# Altium PCB IOT_IO_v0.PcbDoc (part 1 of 3)
Units mil, origin at the board's own origin, x right, y up, seen from the top; angles counter-clockwise.
Board outline 8196.85 x 3393.7 mil, 2 copper layers (Top Layer, Top, Bottom Layer, Bottom); 364 components, 308 nets, 1129 pads, 291 vias.
Unrouted connection lines stored in the file: 7.
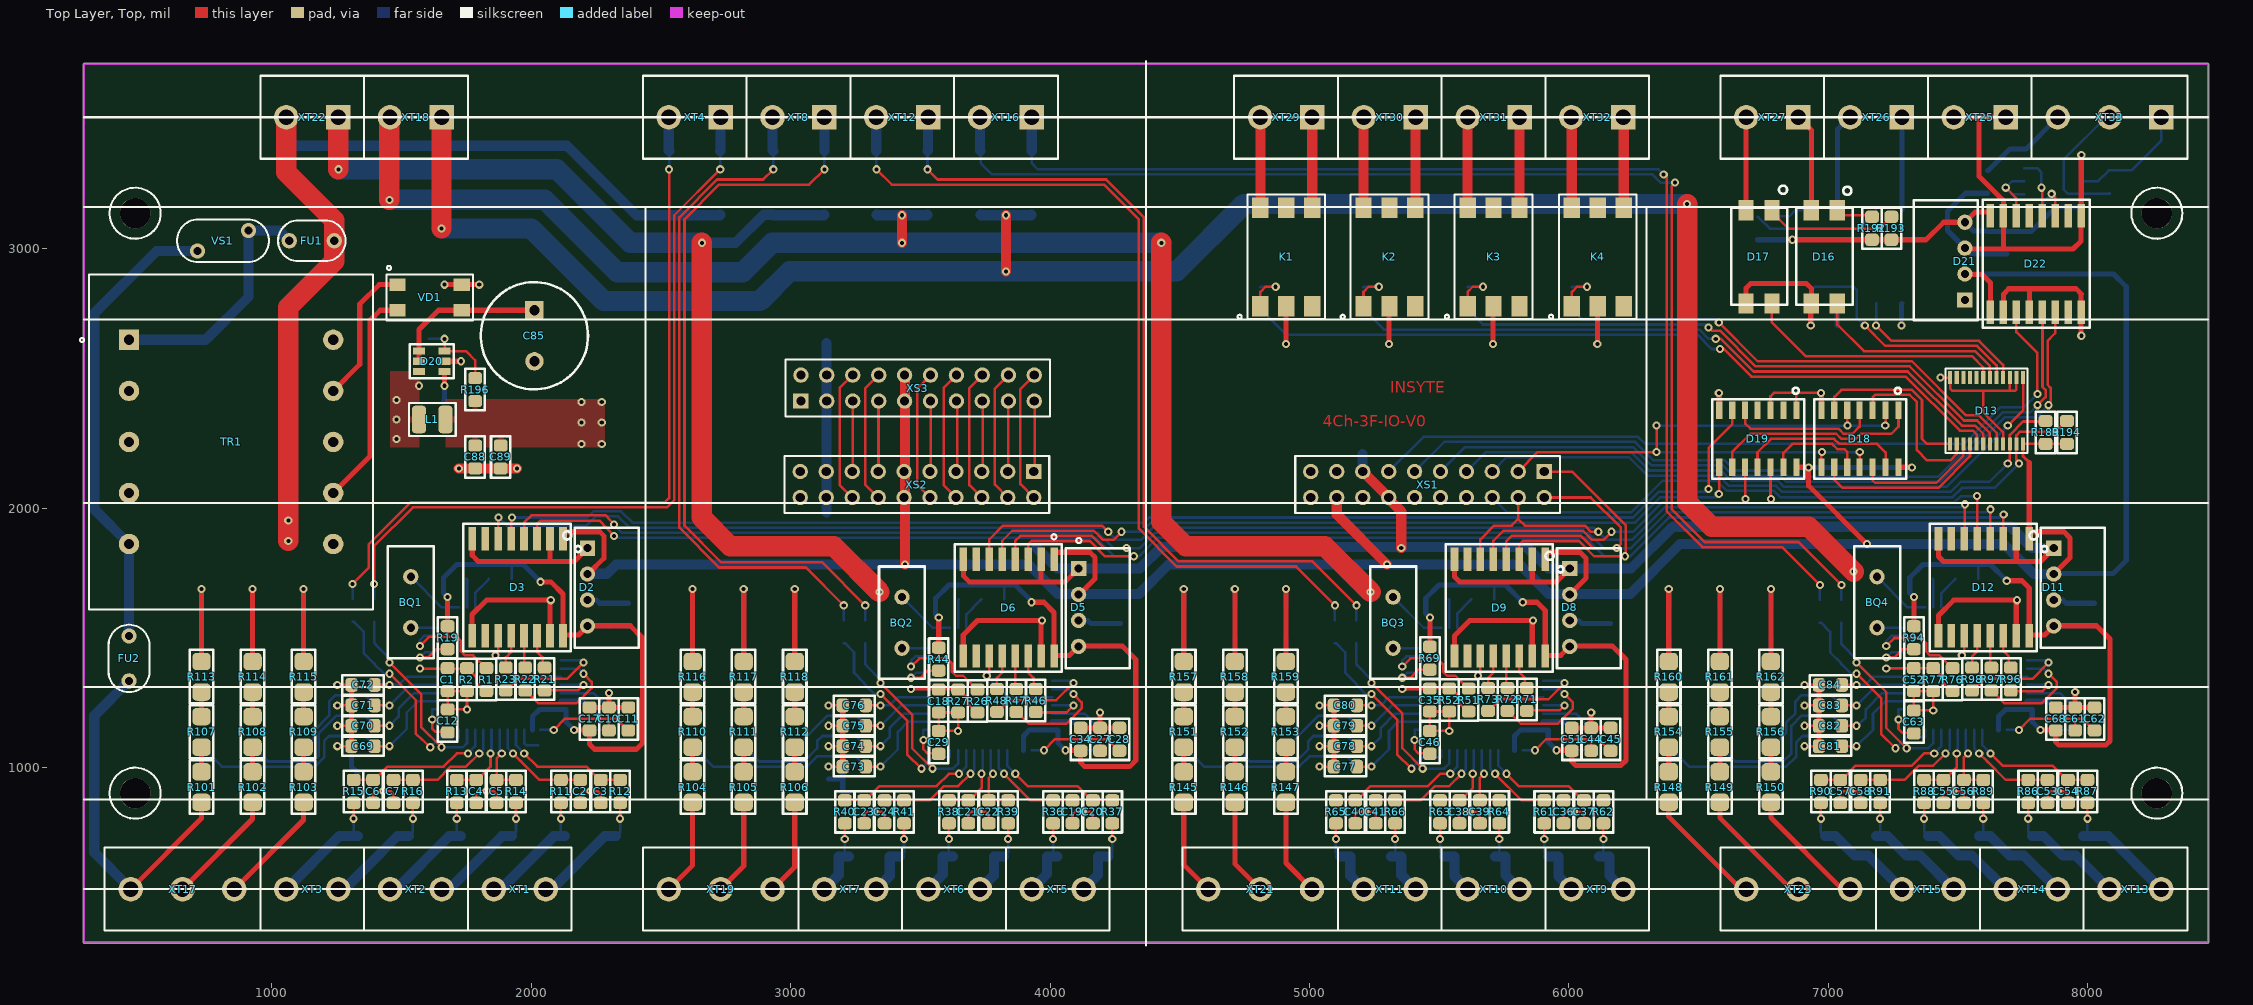
[diagram p0: Top Layer, Top view]
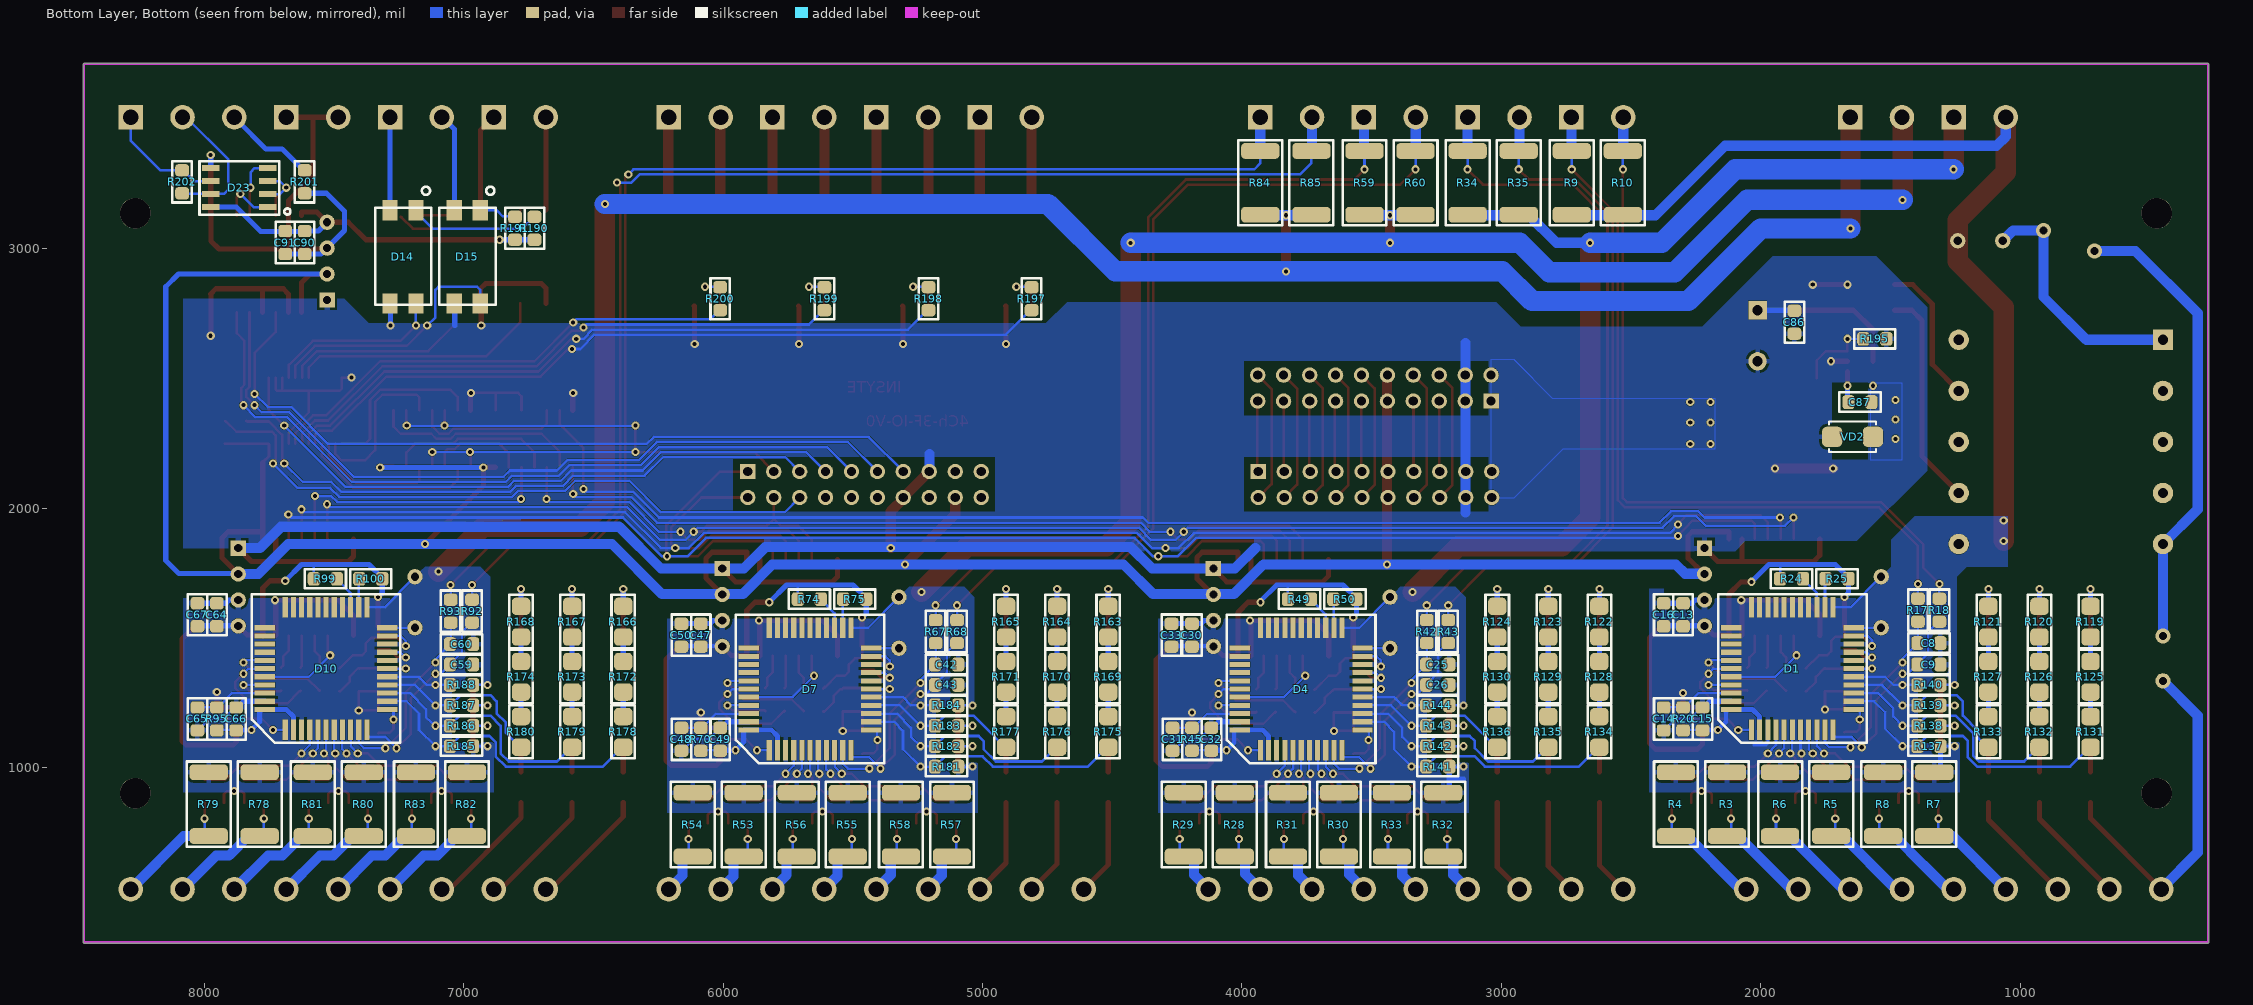
[diagram p1: Bottom Layer, Bottom view, seen from below]

## Layer stack, top to bottom
Top Solder, Top Mask: solder mask 0.4, Solder Resist, Dk 3.5
Top Layer, Top: signal copper 1.4
Dielectric 1: dielectric 12.6, FR-4, Dk 4.8
Bottom Layer, Bottom: signal copper 1.4
Bottom Solder, Bot Mask: solder mask 0.4, Solder Resist, Dk 3.5

## Board outline
271.65,326.77 275.59,322.83 8464.57,322.83 8468.5,326.77 8468.5,3712.6 8464.57,3716.54 275.59,3716.54 271.65,3712.6

## Design rules (kind name [scope] priority, off if disabled: settings)
Clearance "Clearance_Top Layer, Top" [ExistsOnLayer('Top Layer, Top') vs ExistsOnLayer('Top Layer, Top')] p1: gap=0.25 except(7.87: Arc-Arc Arc-Track Arc-THPad Arc-Via Track-Track Track-THPad Track-Via THPad-THPad THPad-Via Via-Via)
Clearance "Clearance_Bottom Layer, Bottom" [ExistsOnLayer('Bottom Layer, Bottom') vs ExistsOnLayer('Bottom Layer, Bottom')] p2: gap=0.25 except(7.87: Arc-Arc Arc-Track Arc-THPad Arc-Via Track-Track Track-THPad Track-Via THPad-THPad THPad-Via Via-Via)
Clearance [All] p3: gap=0.25
ComponentClearance ComponentClearance_Design [All] p1: gap=0.5 collisioncheckmode=3 verticalgap=0.5 showdistances=FALSE
ComponentClearance [All] p2: gap=10 collisioncheckmode=3 verticalgap=10 showdistances=FALSE
PlaneClearance [All] p1: clearance=10
PolygonConnect PolygonConnect_18 [IsPolygon And InNet('GND') And OnLayer('Bottom Layer, Bottom') vs IsVia] p1: connectstyle=Direct reliefconductorwidth=15 reliefentries=4 polygonreliefangle="90 Angle" airgapwidth=10
PolygonConnect PolygonConnect_17 [IsPolygon And InNet('GND') And OnLayer('Bottom Layer, Bottom') vs IsPad] p2: connectstyle=Relief reliefconductorwidth=19.68 reliefentries=4 polygonreliefangle="90 Angle" airgapwidth=10
PolygonConnect PolygonConnect_16 [IsPolygon And InNet('GND3') And OnLayer('Bottom Layer, Bottom') vs IsVia] p3: connectstyle=Direct reliefconductorwidth=15 reliefentries=4 polygonreliefangle="90 Angle" airgapwidth=10
PolygonConnect PolygonConnect_15 [IsPolygon And InNet('GND3') And OnLayer('Bottom Layer, Bottom') vs IsPad] p4: connectstyle=Relief reliefconductorwidth=19.68 reliefentries=4 polygonreliefangle="90 Angle" airgapwidth=10
PolygonConnect PolygonConnect_14 [IsPolygon And InNet('GND4') And OnLayer('Bottom Layer, Bottom') vs IsVia] p5: connectstyle=Direct reliefconductorwidth=15 reliefentries=4 polygonreliefangle="90 Angle" airgapwidth=10
PolygonConnect PolygonConnect_13 [IsPolygon And InNet('GND4') And OnLayer('Bottom Layer, Bottom') vs IsPad] p6: connectstyle=Relief reliefconductorwidth=19.68 reliefentries=4 polygonreliefangle="90 Angle" airgapwidth=10
PolygonConnect PolygonConnect_12 [IsPolygon And InNet('GND2') And OnLayer('Bottom Layer, Bottom') vs IsVia] p7: connectstyle=Direct reliefconductorwidth=15 reliefentries=4 polygonreliefangle="90 Angle" airgapwidth=10
PolygonConnect PolygonConnect_11 [IsPolygon And InNet('GND2') And OnLayer('Bottom Layer, Bottom') vs IsPad] p8: connectstyle=Relief reliefconductorwidth=19.68 reliefentries=4 polygonreliefangle="90 Angle" airgapwidth=10
PolygonConnect PolygonConnect_10 [IsPolygon And InNet('+5V') And OnLayer('Bottom Layer, Bottom') vs IsVia] p9: connectstyle=Direct reliefconductorwidth=15 reliefentries=4 polygonreliefangle="90 Angle" airgapwidth=10
PolygonConnect PolygonConnect_9 [IsPolygon And InNet('+5V') And OnLayer('Bottom Layer, Bottom') vs IsPad] p10: connectstyle=Relief reliefconductorwidth=19.68 reliefentries=4 polygonreliefangle="90 Angle" airgapwidth=10
PolygonConnect PolygonConnect_8 [IsPolygon And InNet('GND1') And OnLayer('Bottom Layer, Bottom') vs IsVia] p11: connectstyle=Direct reliefconductorwidth=15 reliefentries=4 polygonreliefangle="90 Angle" airgapwidth=10
PolygonConnect PolygonConnect_7 [IsPolygon And InNet('GND1') And OnLayer('Bottom Layer, Bottom') vs IsPad] p12: connectstyle=Relief reliefconductorwidth=19.68 reliefentries=4 polygonreliefangle="90 Angle" airgapwidth=10
PolygonConnect PolygonConnect_6 [IsPolygon And InNet('NET00048') And OnLayer('Bottom Layer, Bottom') vs IsVia] p13: connectstyle=Direct reliefconductorwidth=15 reliefentries=4 polygonreliefangle="90 Angle" airgapwidth=10
PolygonConnect PolygonConnect_5 [IsPolygon And InNet('NET00048') And OnLayer('Bottom Layer, Bottom') vs IsPad] p14: connectstyle=Relief reliefconductorwidth=19.68 reliefentries=4 polygonreliefangle="90 Angle" airgapwidth=10
PolygonConnect PolygonConnect_4 [IsPolygon And InNet('+5V') And OnLayer('Top Layer, Top') vs IsVia] p15: connectstyle=Direct reliefconductorwidth=15 reliefentries=4 polygonreliefangle="90 Angle" airgapwidth=10
PolygonConnect PolygonConnect_3 [IsPolygon And InNet('+5V') And OnLayer('Top Layer, Top') vs IsPad] p16: connectstyle=Relief reliefconductorwidth=19.68 reliefentries=4 polygonreliefangle="90 Angle" airgapwidth=10
PolygonConnect PolygonConnect_2 [IsPolygon And InNet('NET00048') And OnLayer('Top Layer, Top') vs IsVia] p17: connectstyle=Direct reliefconductorwidth=15 reliefentries=4 polygonreliefangle="90 Angle" airgapwidth=10
PolygonConnect PolygonConnect_1 [IsPolygon And InNet('NET00048') And OnLayer('Top Layer, Top') vs IsPad] p18: connectstyle=Relief reliefconductorwidth=19.68 reliefentries=4 polygonreliefangle="90 Angle" airgapwidth=10
PolygonConnect [All] p19: connectstyle=Relief reliefconductorwidth=10 reliefentries=4 polygonreliefangle="90 Angle" airgapwidth=10
RoutingVias [All] p1: holewidth=28 width=50 viastyle="Through Hole" minholewidth=28 minwidth=50 maxholewidth=28 maxwidth=50
SolderMaskExpansion [All] p1: expansion=4
Width [All] p1: maxlimit=10 minlimit=10 preferedwidth=10
28 further rules are at their usual default settings.

## Components (designator, comment, footprint, x,y, rotation, side; value= is the part's Value field where it differs from the comment)
BQ1 "13,1072МГц" HC49U_vert 1535.43,1736.22 r270 top
BQ2 "13,1072МГц" HC49U_vert 3429.13,1657.48 r270 top
BQ3 "13,1072МГц" HC49U_vert 5322.83,1657.48 r270 top
BQ4 "13,1072МГц" HC49U_vert 7188.98,1736.22 r270 top
C1 "0,01" 0805 1677.17,1295.28 r90 top
C2 "0,1" 0805 2188.98,952.76 r270 top
C3 "0,1" 0805 2267.72,952.76 r270 top
C4 "0,1" 0805 1787.4,952.76 r270 top
C5 "0,1" 0805 1866.14,952.76 r270 top
C6 "0,1" 0805 1389.76,952.76 r270 top
C7 "0,1" 0805 1468.5,952.76 r270 top
C8 "0,1" 0805 1307.09,1480.32 r0 bottom
C9 "0,1" 0805 1307.09,1397.64 r0 bottom
C10 "0,1" 0805 2299.21,1232.28 r270 top
C11 "10,0" 0805 2374.02,1232.28 r270 top
C12 "1,0" 0805 1677.17,1224.41 r270 top
C13 "0,1" 0805 2299.21,1633.86 r270 bottom
C14 "1,0" 0805 2374.02,1232.28 r270 bottom
C15 "1,0" 0805 2224.41,1232.28 r270 bottom
C16 "10,0" 0805 2374.02,1633.86 r270 bottom
C17 "10,0" 0805 2224.41,1232.28 r270 top
C18 "0,01" 0805 3570.87,1212.6 r90 top
C19 "0,1" 0805 4086.61,874.02 r270 top
C20 "0,1" 0805 4165.35,874.02 r270 top
C21 "0,1" 0805 3685.04,874.02 r270 top
C22 "0,1" 0805 3763.78,874.02 r270 top
C23 "0,1" 0805 3283.46,874.02 r270 top
C24 "0,1" 0805 3362.2,874.02 r270 top
C25 "0,1" 0805 3200.79,1397.64 r0 bottom
C26 "0,1" 0805 3200.79,1318.9 r0 bottom
C27 "0,1" 0805 4192.91,1153.54 r270 top
C28 "10,0" 0805 4267.72,1153.54 r270 top
C29 "1,0" 0805 3570.87,1141.73 r270 top
C30 "0,1" 0805 4192.91,1555.12 r270 bottom
C31 "1,0" 0805 4267.72,1153.54 r270 bottom
C32 "1,0" 0805 4118.11,1153.54 r270 bottom
C33 "10,0" 0805 4271.65,1555.12 r270 bottom
C34 "10,0" 0805 4118.11,1153.54 r270 top
C35 "0,01" 0805 5464.57,1216.54 r90 top
C36 "0,1" 0805 5980.31,874.02 r270 top
C37 "0,1" 0805 6059.06,874.02 r270 top
C38 "0,1" 0805 5578.74,874.02 r270 top
C39 "0,1" 0805 5657.48,874.02 r270 top
C40 "0,1" 0805 5177.17,874.02 r270 top
C41 "0,1" 0805 5255.91,874.02 r270 top
C42 "0,1" 0805 5094.49,1397.64 r0 bottom
C43 "0,1" 0805 5094.49,1318.9 r0 bottom
C44 "0,1" 0805 6086.61,1153.54 r270 top
C45 "10,0" 0805 6161.42,1153.54 r270 top
C46 "1,0" 0805 5464.57,1141.73 r270 top
C47 "0,1" 0805 6086.61,1555.12 r270 bottom
C48 "1,0" 0805 6161.42,1153.54 r270 bottom
C49 "1,0" 0805 6011.81,1153.54 r270 bottom
C50 "10,0" 0805 6161.42,1555.12 r270 bottom
C51 "10,0" 0805 6011.81,1153.54 r270 top
C52 "0,01" 0805 7330.71,1295.28 r90 top
C53 "0,1" 0805 7846.46,952.76 r270 top
C54 "0,1" 0805 7925.2,952.76 r270 top
C55 "0,1" 0805 7444.88,952.76 r270 top
C56 "0,1" 0805 7523.62,952.76 r270 top
C57 "0,1" 0805 7047.24,952.76 r270 top
C58 "0,1" 0805 7125.98,952.76 r270 top
C59 "0,1" 0805 6964.57,1397.64 r0 bottom
C60 "0,1" 0805 6964.57,1476.38 r0 bottom
C61 "0,1" 0805 7952.76,1232.28 r270 top
C62 "10,0" 0805 8027.56,1232.28 r270 top
C63 "1,0" 0805 7330.71,1220.47 r270 top
C64 "0,1" 0805 7952.76,1633.86 r270 bottom
C65 "1,0" 0805 8027.56,1232.28 r270 bottom
C66 "1,0" 0805 7877.95,1232.28 r270 bottom
C67 "10,0" 0805 8027.56,1633.86 r270 bottom
C68 "10,0" 0805 7877.95,1232.28 r270 top
C69 "0,1" 0805 1307.09,1082.68 r0 top
C70 "0,1" 0805 1307.09,1161.42 r0 top
C71 "0,1" 0805 1307.09,1240.16 r0 top
C72 "0,1" 0805 1307.09,1318.9 r0 top
C73 "0,1" 0805 3200.79,1003.94 r0 top
C74 "0,1" 0805 3200.79,1082.68 r0 top
C75 "0,1" 0805 3200.79,1161.42 r0 top
C76 "0,1" 0805 3200.79,1240.16 r0 top
C77 "0,1" 0805 5094.49,1003.94 r0 top
C78 "0,1" 0805 5094.49,1082.68 r0 top
C79 "0,1" 0805 5094.49,1161.42 r0 top
C80 "0,1" 0805 5094.49,1240.16 r0 top
C81 "0,1" 0805 6964.57,1082.68 r0 top
C82 "0,1" 0805 6964.57,1161.42 r0 top
C83 "0,1" 0805 6964.57,1240.16 r0 top
C84 "0,1" 0805 6964.57,1318.9 r0 top
C85 "1000мкФ" К50-35_1000x25-d100x05 2011.81,2763.78 r270 top
C86 "0,1" 0805 1870.08,2673.23 r90 bottom
C87 "0,1" 0805 1661.42,2409.45 r180 bottom
C88 "10,0" 0805 1783.46,2153.54 r90 top
C89 "10,0" 0805 1881.89,2153.54 r90 top
C90 "0,1" 0805 7614.17,2980.32 r90 bottom
C91 "10,0" 0805 7688.98,2980.32 r90 bottom
D1 "{Value}" TQFP-44 2035.43,1145.67 r90 bottom
D2 "AM1L-0303S-NZ" SIP-4 2216.54,1846.46 r270 top
D3 "{Value}" SOL-16 2122.05,1881.89 r270 top
D4 "{Value}" TQFP-44 3929.13,1066.93 r90 bottom
D5 "AM1L-0303S-NZ" SIP-4 4110.24,1767.72 r270 top
D6 "{Value}" SOL-16 4015.75,1803.15 r270 top
D7 "{Value}" TQFP-44 5822.83,1066.93 r90 bottom
D8 "AM1L-0303S-NZ" SIP-4 6003.94,1767.72 r270 top
D9 "{Value}" SOL-16 5909.45,1803.15 r270 top
D10 "{Value}" TQFP-44 7688.98,1145.67 r90 bottom
D11 "AM1L-0303S-NZ" SIP-4 7870.08,1846.46 r270 top
D12 "{Value}" SOL-16 7775.59,1881.89 r270 top
D13 "{Value}" TSSOP-24 7751.97,2503.94 r270 top
D14 "{Value}" DIP-04_Primary 7185.04,3149.61 r270 bottom
D15 "{Value}" DIP-04_Primary 6937.01,3149.61 r270 bottom
D16 "{Value}" DIP-04_Primary 7035.43,3149.61 r270 top
D17 "{Value}" DIP-04_Primary 6783.46,3149.61 r270 top
D18 "{Value}" SO-14 7271.65,2377.95 r270 top
D19 "{Value}" SO-14 6877.95,2377.95 r270 top
D20 "" SOT-23-6 1665.35,2527.56 r180 top
D21 "AM1L-0303S-NZ" SIP-4 7527.56,2803.15 r90 top
D22 "{Value}" SOL-16 7625.98,2755.91 r90 top
D23 "" SO-08 7755.91,3161.42 r0 bottom
FU1 "" LB080F 1240.16,3031.5 r270 top
FU2 "{Value}" LB080F 448.82,1334.65 r180 top
K1 "" DIP-6S 4811.02,2779.53 r90 top
K2 "" DIP-6S 5208.66,2779.53 r90 top
K3 "" DIP-6S 5610.24,2779.53 r90 top
K4 "" DIP-6S 6011.81,2779.53 r90 top
L1 "SRN3015-3R3M" SRN3015 1566.93,2342.52 r0 top
R1 "75к" 0805 1826.77,1295.28 r90 top
R2 "43к" 0805 1751.97,1295.28 r90 top
R3 "0,02" 2512 2129.92,736.22 r90 bottom
R4 "0,02" 2512 2326.77,736.22 r90 bottom
R5 "0,02" 2512 1728.35,736.22 r90 bottom
R6 "0,02" 2512 1925.2,736.22 r90 bottom
R7 "0,02" 2512 1330.71,736.22 r90 bottom
R8 "0,02" 2512 1527.56,736.22 r90 bottom
R9 "0,02" 2512 2728.35,3377.95 r270 bottom
R10 "0,02" 2512 2531.5,3377.95 r270 bottom
R11 "100" 0805 2114.17,952.76 r270 top
R12 "100" 0805 2342.52,952.76 r270 top
R13 "100" 0805 1712.6,952.76 r270 top
R14 "100" 0805 1940.94,952.76 r270 top
R15 "100" 0805 1314.96,952.76 r270 top
R16 "100" 0805 1543.31,952.76 r270 top
R17 "100" 0805 1393.7,1562.99 r90 bottom
R18 "100" 0805 1311.02,1562.99 r90 bottom
R19 "10к" 0805 1677.17,1456.69 r90 top
R20 "10к" 0805 2299.21,1232.28 r270 bottom
R21 "10к" 0805 2051.18,1385.83 r270 top
R22 "10к" 0805 1976.38,1385.83 r270 top
R23 "10к" 0805 1901.57,1385.83 r270 top
R24 "10к" 0805 1925.2,1728.35 r180 bottom
R25 "10к" 0805 1661.42,1728.35 r0 bottom
R26 "75к" 0805 3720.47,1212.6 r90 top
R27 "43к" 0805 3645.67,1212.6 r90 top
R28 "0,02" 2512 4027.56,657.48 r90 bottom
R29 "0,02" 2512 4224.41,657.48 r90 bottom
R30 "0,02" 2512 3625.98,657.48 r90 bottom
R31 "0,02" 2512 3822.83,657.48 r90 bottom
R32 "0,02" 2512 3224.41,657.48 r90 bottom
R33 "0,02" 2512 3421.26,657.48 r90 bottom
R34 "0,02" 2512 3129.92,3377.95 r270 bottom
R35 "0,02" 2512 2933.07,3377.95 r270 bottom
R36 "100" 0805 4011.81,874.02 r270 top
R37 "100" 0805 4240.16,874.02 r270 top
R38 "100" 0805 3610.24,874.02 r270 top
R39 "100" 0805 3838.58,874.02 r270 top
R40 "100" 0805 3208.66,874.02 r270 top
R41 "100" 0805 3437.01,874.02 r270 top
R42 "100" 0805 3287.4,1480.32 r90 bottom
R43 "100" 0805 3204.72,1480.32 r90 bottom
R44 "10к" 0805 3570.87,1374.02 r90 top
R45 "10к" 0805 4192.91,1153.54 r270 bottom
R46 "10к" 0805 3944.88,1303.15 r270 top
R47 "10к" 0805 3870.08,1303.15 r270 top
R48 "10к" 0805 3795.28,1303.15 r270 top
R49 "10к" 0805 3822.83,1649.61 r180 bottom
R50 "10к" 0805 3559.06,1649.61 r0 bottom
R51 "75к" 0805 5614.17,1216.54 r90 top
R52 "43к" 0805 5539.37,1216.54 r90 top
R53 "0,02" 2512 5921.26,657.48 r90 bottom
R54 "0,02" 2512 6118.11,657.48 r90 bottom
R55 "0,02" 2512 5519.69,657.48 r90 bottom
R56 "0,02" 2512 5716.54,657.48 r90 bottom
R57 "0,02" 2512 5118.11,657.48 r90 bottom
R58 "0,02" 2512 5314.96,657.48 r90 bottom
R59 "0,02" 2512 3527.56,3377.95 r270 bottom
R60 "0,02" 2512 3330.71,3377.95 r270 bottom
R61 "100" 0805 5905.51,874.02 r270 top
R62 "100" 0805 6133.86,874.02 r270 top
R63 "100" 0805 5503.94,874.02 r270 top
R64 "100" 0805 5732.28,874.02 r270 top
R65 "100" 0805 5102.36,874.02 r270 top
R66 "100" 0805 5330.71,874.02 r270 top
R67 "100" 0805 5181.1,1480.32 r90 bottom
R68 "100" 0805 5098.43,1480.32 r90 bottom
R69 "10к" 0805 5464.57,1377.95 r90 top
R70 "10к" 0805 6086.61,1153.54 r270 bottom
R71 "10к" 0805 5838.58,1307.09 r270 top
R72 "10к" 0805 5763.78,1307.09 r270 top
R73 "10к" 0805 5688.98,1307.09 r270 top
R74 "10к" 0805 5712.6,1649.61 r180 bottom
R75 "10к" 0805 5448.82,1649.61 r0 bottom
R76 "75к" 0805 7480.31,1295.28 r90 top
R77 "43к" 0805 7405.51,1295.28 r90 top
R78 "0,02" 2512 7787.4,736.22 r90 bottom
R79 "0,02" 2512 7984.25,736.22 r90 bottom
R80 "0,02" 2512 7385.83,736.22 r90 bottom
R81 "0,02" 2512 7582.68,736.22 r90 bottom
R82 "0,02" 2512 6988.19,736.22 r90 bottom
R83 "0,02" 2512 7185.04,736.22 r90 bottom
R84 "0,02" 2512 3929.13,3377.95 r270 bottom
R85 "0,02" 2512 3732.28,3377.95 r270 bottom
R86 "100" 0805 7771.65,952.76 r270 top
R87 "100" 0805 8000,952.76 r270 top
R88 "100" 0805 7370.08,952.76 r270 top
R89 "100" 0805 7598.43,952.76 r270 top
R90 "100" 0805 6972.44,952.76 r270 top
R91 "100" 0805 7200.79,952.76 r270 top
R92 "100" 0805 6968.5,1559.06 r90 bottom
R93 "100" 0805 7051.18,1559.06 r90 bottom
R94 "10к" 0805 7330.71,1456.69 r90 top
R95 "10к" 0805 7952.76,1232.28 r270 bottom
R96 "10к" 0805 7704.72,1385.83 r270 top
R97 "10к" 0805 7629.92,1385.83 r270 top
R98 "10к" 0805 7555.12,1385.83 r270 top
R99 "10к" 0805 7578.74,1728.35 r180 bottom
R100 "10к" 0805 7314.96,1728.35 r0 bottom
R101 "200к" 1206 728.35,866.14 r90 top
R102 "200к" 1206 925.2,866.14 r90 top
R103 "200к" 1206 1122.05,866.14 r90 top
R104 "200к" 1206 2622.05,866.14 r90 top
R105 "200к" 1206 2818.9,866.14 r90 top
R106 "200к" 1206 3015.75,866.14 r90 top
R107 "200к" 1206 728.35,1078.74 r90 top
R108 "200к" 1206 925.2,1078.74 r90 top
R109 "200к" 1206 1122.05,1078.74 r90 top
R110 "200к" 1206 2622.05,1078.74 r90 top
R111 "200к" 1206 2818.9,1078.74 r90 top
R112 "200к" 1206 3015.75,1078.74 r90 top
R113 "200к" 1206 728.35,1291.34 r90 top
R114 "200к" 1206 925.2,1291.34 r90 top
R115 "200к" 1206 1122.05,1291.34 r90 top
R116 "200к" 1206 2622.05,1291.34 r90 top
R117 "200к" 1206 2818.9,1291.34 r90 top
R118 "200к" 1206 3015.75,1291.34 r90 top
R119 "200к" 1206 728.35,1503.94 r90 bottom
R120 "200к" 1206 925.2,1503.94 r90 bottom
R121 "200к" 1206 1122.05,1503.94 r90 bottom
R122 "200к" 1206 2622.05,1503.94 r90 bottom
R123 "200к" 1206 2818.9,1503.94 r90 bottom
R124 "200к" 1206 3015.75,1503.94 r90 bottom
R125 "200к" 1206 728.35,1291.34 r90 bottom
R126 "200к" 1206 925.2,1291.34 r90 bottom
R127 "200к" 1206 1122.05,1291.34 r90 bottom
R128 "200к" 1206 2622.05,1291.34 r90 bottom
R129 "200к" 1206 2818.9,1291.34 r90 bottom
R130 "200к" 1206 3015.75,1291.34 r90 bottom
R131 "200к" 1206 728.35,1078.74 r90 bottom
R132 "200к" 1206 925.2,1078.74 r90 bottom
R133 "200к" 1206 1122.05,1078.74 r90 bottom
R134 "200к" 1206 2622.05,1078.74 r90 bottom
R135 "200к" 1206 2818.9,1078.74 r90 bottom
R136 "200к" 1206 3015.75,1078.74 r90 bottom
R137 "100" 0805 1307.09,1082.68 r0 bottom
R138 "100" 0805 1307.09,1161.42 r0 bottom
R139 "100" 0805 1307.09,1240.16 r0 bottom
R140 "100" 0805 1307.09,1318.9 r0 bottom
R141 "100" 0805 3200.79,1003.94 r0 bottom
R142 "100" 0805 3200.79,1082.68 r0 bottom
R143 "100" 0805 3200.79,1161.42 r0 bottom
R144 "100" 0805 3200.79,1240.16 r0 bottom
R145 "200к" 1206 4515.75,866.14 r90 top
R146 "200к" 1206 4712.6,866.14 r90 top
R147 "200к" 1206 4909.45,866.14 r90 top
R148 "200к" 1206 6385.83,866.14 r90 top
R149 "200к" 1206 6582.68,866.14 r90 top
R150 "200к" 1206 6779.53,866.14 r90 top
R151 "200к" 1206 4515.75,1078.74 r90 top
R152 "200к" 1206 4712.6,1078.74 r90 top
R153 "200к" 1206 4909.45,1078.74 r90 top
R154 "200к" 1206 6385.83,1078.74 r90 top
R155 "200к" 1206 6582.68,1078.74 r90 top
R156 "200к" 1206 6779.53,1078.74 r90 top
R157 "200к" 1206 4515.75,1291.34 r90 top
R158 "200к" 1206 4712.6,1291.34 r90 top
R159 "200к" 1206 4909.45,1291.34 r90 top
R160 "200к" 1206 6385.83,1291.34 r90 top
R161 "200к" 1206 6582.68,1291.34 r90 top
R162 "200к" 1206 6779.53,1291.34 r90 top
R163 "200к" 1206 4515.75,1503.94 r90 bottom
R164 "200к" 1206 4712.6,1503.94 r90 bottom
R165 "200к" 1206 4909.45,1503.94 r90 bottom
R166 "200к" 1206 6385.83,1503.94 r90 bottom
R167 "200к" 1206 6582.68,1503.94 r90 bottom
R168 "200к" 1206 6779.53,1503.94 r90 bottom
R169 "200к" 1206 4515.75,1291.34 r90 bottom
R170 "200к" 1206 4712.6,1291.34 r90 bottom
R171 "200к" 1206 4909.45,1291.34 r90 bottom
R172 "200к" 1206 6385.83,1291.34 r90 bottom
R173 "200к" 1206 6582.68,1291.34 r90 bottom
R174 "200к" 1206 6779.53,1291.34 r90 bottom
R175 "200к" 1206 4515.75,1078.74 r90 bottom
R176 "200к" 1206 4712.6,1078.74 r90 bottom
R177 "200к" 1206 4909.45,1078.74 r90 bottom
R178 "200к" 1206 6385.83,1078.74 r90 bottom
R179 "200к" 1206 6582.68,1078.74 r90 bottom
R180 "200к" 1206 6779.53,1078.74 r90 bottom
R181 "100" 0805 5094.49,1003.94 r0 bottom
R182 "100" 0805 5094.49,1082.68 r0 bottom
R183 "100" 0805 5094.49,1161.42 r0 bottom
R184 "100" 0805 5094.49,1240.16 r0 bottom
R185 "100" 0805 6964.57,1082.68 r0 bottom
R186 "100" 0805 6964.57,1161.42 r0 bottom
R187 "100" 0805 6964.57,1240.16 r0 bottom
R188 "100" 0805 6964.57,1318.9 r0 bottom
R189 "3,3к" 0805 7838.58,2248.03 r90 top
R190 "620" 0805 6728.35,3035.43 r90 bottom
R191 "620" 0805 6803.15,3035.43 r90 bottom
R192 "620" 0805 7169.29,3035.43 r90 top
R193 "620" 0805 7244.09,3035.43 r90 top
R194 "3,3к" 0805 7921.26,2248.03 r90 top
R195 "82к" 0805 1515.75,2653.54 r0 bottom
R196 "430к" 0805 1783.46,2413.39 r90 top
R197 "620" 0805 4811.02,2763.78 r90 bottom
R198 "620" 0805 5208.66,2763.78 r90 bottom
R199 "620" 0805 5610.24,2763.78 r90 bottom
R200 "620" 0805 6011.81,2763.78 r90 bottom
R201 "100" 0805 7614.17,3303.15 r270 bottom
R202 "120" 0805 8086.61,3303.15 r270 bottom
TR1 "" EI305-2052 448.82,2649.61 r0 top
VD1 "" MB10_MB05S(Primary) 1484.25,2862.2 r0 top
VD2 "{Value}" SMA_MBRA340T3G(Primary) 1566.93,2275.59 r0 bottom
VS1 "{Value}" B72207S0251K101 909.45,3070.87 r270 top
XS1 "" PBD-20WRLES 5905.51,2141.73 r180 top locked
XS2 "" PBD-20WRLES 3937.01,2141.73 r180 top locked
XS3 "" PBD-20WRLES 3039.37,2413.39 r0 top locked
XT1 "5.08" EK508V-02P#1 1855.12,531.5 r0 top locked
XT2 "5.08" EK508V-02P#1 1455.12,531.5 r0 top locked
XT3 "5.08" EK508V-02P#1 1055.12,531.5 r0 top locked
XT4 "5.08" EK508V-02P#2 2729.92,3507.87 r180 top locked
XT5 "5.08" EK508V-02P#1 3929.92,531.5 r0 top locked
XT6 "5.08" EK508V-02P#1 3529.92,531.5 r0 top locked
XT7 "5.08" EK508V-02P#1 3129.92,531.5 r0 top locked
XT8 "5.08" EK508V-02P#2 3129.92,3507.87 r180 top locked
XT9 "5.08" EK508V-02P#1 6010.24,531.5 r0 top locked
XT10 "5.08" EK508V-02P#1 5610.24,531.5 r0 top locked
XT11 "5.08" EK508V-02P#1 5210.24,531.5 r0 top locked
XT12 "5.08" EK508V-02P#2 3529.92,3507.87 r180 top locked
XT13 "5.08" EK508V-02P#1 8085.04,531.5 r0 top locked
XT14 "5.08" EK508V-02P#1 7685.04,531.5 r0 top locked
XT15 "5.08" EK508V-02P#1 7285.04,531.5 r0 top locked
XT16 "5.08" EK508V-02P#2 3929.92,3507.87 r180 top locked
XT17 "5.08" EK508V-03P#1 455.12,531.5 r0 top locked
XT18 "5.08" EK508V-02P#2 1655.12,3507.87 r180 top locked
XT19 "5.08" EK508V-03P#1 2529.92,531.5 r0 top locked
XT21 "5.08" EK508V-03P#1 4610.24,531.5 r0 top locked
XT22 "5.08" EK508V-02P#2 1255.12,3507.87 r180 top locked
XT23 "5.08" EK508V-03P#1 6685.04,531.5 r0 top locked
XT25 "5.08" EK508V-02P#2 7685.04,3507.87 r180 top locked
XT26 "5.08" EK508V-02P#2 7285.04,3507.87 r180 top locked
XT27 "5.08" EK508V-02P#2 6885.04,3507.87 r180 top locked
XT29 "5.08" EK508V-02P#2 5010.24,3507.87 r180 top locked
XT30 "5.08" EK508V-02P#2 5410.24,3507.87 r180 top locked
XT31 "5.08" EK508V-02P#2 5810.24,3507.87 r180 top locked
XT32 "5.08" EK508V-02P#2 6210.24,3507.87 r180 top locked
XT33 "5.08" EK508V-03P#2 8285.04,3507.87 r180 top locked

## Footprints (in the part's own frame and the unit in brackets; to place one, negate y for a bottom-side part, rotate by r counter-clockwise, add the part's x,y. Pads: shape width x height; smd on the part's side, far side on the other; paste and mask are expansions set on the pad)
0805 [mm]
  rrect50% 1.2x1.35 smd: 1(0,0) 2(2.25,0)
  silkscreen extent -0.9,-0.95 3.15,0.95
1206 [mm]
  rrect50% 1.7x1.8 smd: 1(0,0) 2(3,0)
  silkscreen extent -1.1,-1.15 4.13,1.15
2512 [mm]
  rrect50% 1.55x3.75 smd: 1(0,0) 2(6.25,0)
  silkscreen extent -1.05,-2.15 7.3,2.15
B72207S0251K101 [mm]
  round 1.5 hole 0.8: 1(0,0) 2(2,-5)
  silkscreen extent -1.1,-7 3.1,2
DIP-04_Primary [mm]
  rect 2x1.5 smd: 1(0,0) 2(0,-2.54) 3(9.144,-2.54) 4(9.144,0)
  silkscreen extent -2.3,-4 9.26,1.5
DIP-6S [mm]
  rect 2x1.6 smd: 1(0,0) 2(0,-2.54) 3(0,-5.08) 4(9.652,-5.08) 5(9.652,-2.54) 6(9.652,0)
  silkscreen extent -1.27,-6.35 10.92,2.23
EI305-2052 [mm]
  rect 2x2 hole 1: 1(0,0)
  round 2 hole 1: 2(0,-5) 3(0,-10) 4(0,-15) 5(0,-20) 6(20,-20) 7(20,-15) 8(20,-10) 9(20,-5) 10(20,0)
  silkscreen extent -4.8,-26.4 23.9,6.4
EK508V-02P#1 [mm]
  round 2.4 hole 1.5: 1(0,0) 2(5.08,0)
  silkscreen extent -2.54,-4.06 7.62,4.06
EK508V-02P#2 [mm]
  rect 2.4x2.4 hole 1.5: 1(0,0)
  round 2.4 hole 1.5: 2(5.08,0)
  silkscreen extent -2.54,-4.06 7.62,4.06
EK508V-03P#1 [mm]
  round 2.4 hole 1.5: 1(0,0) 2(5.08,0) 3(10.16,0)
  silkscreen extent -2.54,-4.06 12.7,4.06
EK508V-03P#2 [mm]
  rect 2.4x2.4 hole 1.5: 1(0,0)
  round 2.4 hole 1.5: 2(5.08,0) 3(10.16,0)
  silkscreen extent -2.54,-4.06 12.7,4.06
HC49U_vert [mm]
  round 1.5 hole 0.8: 1(0,0) 2(5,0)
  silkscreen extent -3,-2.25 8,2.25
LB080F [mm]
  round 1.5 hole 0.8: 1(0,0) 2(0,-4.4)
  silkscreen extent -2,-5.5 2,1.1
MB10_MB05S(Primary) [mm]
  rect 1.6x1.2 smd: 1(6.3,0) 2(6.3,-2.5) 3(0,0) 4(0,-2.5)
  silkscreen extent -1.1,-3.5 7.4,1.85
PBD-20WRLES [mm]
  rect 1.5x1.5 hole 0.9: 1(0,0)
  round 1.5 hole 0.9: 2(0,2.54) 3(2.54,0) 4(2.54,2.54) 5(5.08,0) 6(5.08,2.54) 7(7.62,0) 8(7.62,2.54) 9(10.16,0) 10(10.16,2.54) 11(12.69,0) 12(12.69,2.54) 13(15.23,0) 14(15.23,2.54) 15(17.77,0) 16(17.77,2.54) 17(20.32,0) 18(20.32,2.54) 19(22.86,0) 20(22.86,2.54)
  silkscreen extent -1.52,-1.52 24.38,4.06
SIP-4 [mm]
  rect 1.5x1.5 hole 0.8: 1(0,0)
  round 1.5 hole 0.8: 2(2.54,0) 3(5.08,0) 4(7.62,0)
  silkscreen extent -2,-2.38 9.75,5
SMA_MBRA340T3G(Primary) [mm]
  rrect50% 2x2 smd: A(4,0) K(0,0)
  silkscreen extent -0.3,-1.5 4.3,1.5
SO-08 [mm]
  rect 1.7x0.6 smd: 1(0,0) 2(0,-1.27) 3(0,-2.54) 4(0,-3.81) 5(5.58,-3.81) 6(5.58,-2.54) 7(5.58,-1.27) 8(5.58,0)
  silkscreen extent -2.21,-4.5 6.7,0.75
SO-14 [mm]
  rect 1.7x0.6 smd: 1(0,0) 2(0,-1.27) 3(0,-2.54) 4(0,-3.81) 5(0,-5.02) 6(0,-6.29) 7(0,-7.56) 8(5.58,-7.56) 9(5.58,-6.29) 10(5.58,-5.02) 11(5.58,-3.81) 12(5.58,-2.54) 13(5.58,-1.27) 14(5.58,0)
  silkscreen extent -2.21,-8.25 6.7,0.75
SOL-16 [mm]
  rect 2.3x0.75 smd: 1(0,0) 2(0,-1.27) 3(0,-2.54) 4(0,-3.81) 5(0,-5.08) 6(0,-6.35) 7(0,-7.62) 8(0,-8.89) 9(9.465,-8.89) 10(9.465,-7.62) 11(9.465,-6.35) 12(9.465,-5.08) 13(9.465,-3.81) 14(9.465,-2.54) 15(9.465,-1.27) 16(9.465,0)
  silkscreen extent -1.5,-9.75 11,1.78
SOT-23-6 [mm]
  rect 1.2x0.7 smd: 1(0,0) 2(0,-1) 3(0,-2) 4(2.5,-2) 5(2.5,-1) 6(2.5,0)
  silkscreen extent -0.9,-2.65 3.4,0.65
SRN3015 [mm]
  rrect50% 1.4x2.7 smd: 1(0,0) 2(2.6,0)
  silkscreen extent -1,-1.6 3.6,1.6
TQFP-44 [mm]
  rect 2x0.5 smd: 1(0,0) 2(0,-0.8) 3(0,-1.6) 4(0,-2.4) 5(0,-3.2) 6(0,-4) 7(0,-4.8) 8(0,-5.6) 9(0,-6.4) 10(0,-7.2) 11(0,-8) 23(12,-8) 24(12,-7.2) 25(12,-6.4) 26(12,-5.6) 27(12,-4.8) 28(12,-4) 29(12,-3.2) 30(12,-2.4) 31(12,-1.6) 32(12,-0.8) 33(12,0)
  rect 0.5x2 smd: 12(2,-10) 13(2.8,-10) 14(3.6,-10) 15(4.4,-10) 16(5.2,-10) 17(6,-10) 18(6.8,-10) 19(7.6,-10) 20(8.4,-10) 21(9.2,-10) 22(10,-10) 34(10,2) 35(9.2,2) 36(8.4,2) 37(7.6,2) 38(6.8,2) 39(6,2) 40(5.2,2) 41(4.4,2) 42(3.6,2) 43(2.8,2) 44(2,2)
  silkscreen extent -1.28,-11.27 13.28,3.27
TSSOP-24 [mm]
  rect 1.3x0.4 smd: 1(0,0) 2(0,-0.65) 3(0,-1.3) 4(0,-1.95) 5(0,-2.6) 6(0,-3.25) 7(0,-3.9) 8(0,-4.55) 9(0,-5.2) 10(0,-5.85) 11(0,-6.5) 12(0,-7.15) 13(6.5,-7.15) 14(6.5,-6.5) 15(6.5,-5.85) 16(6.5,-5.2) 17(6.5,-4.55) 18(6.5,-3.9) 19(6.5,-3.25) 20(6.5,-2.6) 21(6.5,-1.95) 22(6.5,-1.3) 23(6.5,-0.65) 24(6.5,0)
  silkscreen extent -0.9,-7.6 7.4,0.45
К50-35_1000x25-d100x05 [mm]
  rect 1.8x1.8 hole 1: 1(0,0)
  round 1.8 hole 1: 2(5,0)
  silkscreen extent -2.75,-5.25 7.75,5.25

## Part data
BQ1 BQ2 BQ3 BQ4: "РЕЗОНАТОР"
C1 C2 C3 C4 C5 C6 C7 C8 C9 C10 C11 C12 C13 C14 C15 C16 C17 C18 C19 C20 C21 C22 C23 C24 C25 C26 C27 C28 C29 C30 C31 C32 C33 C34 C35 C36 C37 C38 C39 C40 C41 C42 C43 C44 C45 C46 C47 C48 C49 C50 C51 C52 C53 C54 C55 C56 C57 C58 C59 C60 C61 C62 C63 C64 C65 C66 C67 C68 C69 C70 C71 C72 C73 C74 C75 C76 C77 C78 C79 C80 C81 C82 C83 C84 C85 C86 C87 C88 C89 C90 C91: "КОНДЕНСАТОР"
D1 D3 D4 D6 D7 D9 D10 D12 D13 D14 D15 D16 D17 D18 D19 D20 D22 D23 FU1 FU2 K1 K2 K3 K4 L1 TR1 VD1 VD2 VS1 XS1 XS2 XS3 XT1 XT2 XT3 XT4 XT5 XT6 XT7 XT8 XT9 XT10 XT11 XT12 XT13 XT14 XT15 XT16 XT17 XT18 XT19 XT21 XT22 XT23 XT25 XT26 XT27 XT29 XT30 XT31 XT32 XT33: "{Description}"
D2 D5 D8 D11 D21: "МИКРОСХЕМА"
R1 R2 R3 R4 R5 R6 R7 R8 R9 R10 R11 R12 R13 R14 R15 R16 R17 R18 R19 R20 R21 R22 R23 R24 R25 R26 R27 R28 R29 R30 R31 R32 R33 R34 R35 R36 R37 R38 R39 R40 R41 R42 R43 R44 R45 R46 R47 R48 R49 R50 R51 R52 R53 R54 R55 R56 R57 R58 R59 R60 R61 R62 R63 R64 R65 R66 R67 R68 R69 R70 R71 R72 R73 R74 R75 R76 R77 R78 R79 R80 R81 R82 R83 R84 R85 R86 R87 R88 R89 R90 R91 R92 R93 R94 R95 R96 R97 R98 R99 R100 R101 R102 R103 R104 R105 R106 R107 R108 R109 R110 R111 R112 R113 R114 R115 R116 R117 R118 R119 R120 R121 R122 R123 R124 R125 R126 R127 R128 R129 R130 R131 R132 R133 R134 R135 R136 R137 R138 R139 R140 R141 R142 R143 R144 R145 R146 R147 R148 R149 R150 R151 R152 R153 R154 R155 R156 R157 R158 R159 R160 R161 R162 R163 R164 R165 R166 R167 R168 R169 R170 R171 R172 R173 R174 R175 R176 R177 R178 R179 R180 R181 R182 R183 R184 R185 R186 R187 R188 R189 R190 R191 R192 R193 R194 R195 R196 R197 R198 R199 R200 R201 R202: "РЕЗИСТОР"

## Free pads (board coordinates)
  round 118.11 hole 118.11 unplated: 0(472.44,901.57) 0(472.44,3137.8) 0(8267.72,901.57) 0(8267.72,3137.8)

## Via types
v1: diameter 31.5, hole 15.75, Top Layer, Top to Bottom Layer, Bottom, 291 vias

## Nets (pads, with @x,y where several pads share a name; then routed paths per layer and width w, separated by ;. In a path a pad name is that pad's centre, name@x,y a point inside that pad or via, vN(x,y) a via of type N, cw(c..) or ccw(c..) an arc to the next point about the centre after c; other vN are vias at no path point)
+3,3V: D2.2 D3.1 D5.2 D6.1 D8.2 D9.1 D11.2 D12.1 D13.24 D18.14 D19.14 D21.2 D22.1 R189.1 R194.1 XS1.18 XS2.11 XS2.12 XS3.9 XS3.10 | length 12104.9
  Top Layer, Top w9.84: D13.24@7751.97,2248.03 R189.1@7838.58,2248.03 R194.1@7921.26,2248.03
  Top Layer, Top w11.81: D13.24@7751.97,2248.03 7751.97,2200.79 7775.59,2177.17
  Top Layer, Top w19.68: D3.1@2122.05,1881.89 2122.05,1909.45 2263.78,1909.45 2279.53,1893.7 2279.53,1807.09 2224.41,1751.97 D2.2@2216.54,1746.46 ; XS3.10@3439.37,2513.39 XS3.10@3440.94,2511.81 ; XS2.12@3440.94,2038.19 XS2.12@3437.4,2041.73 XS2.12@3440.94,2045.28 ; XS2.11@3440.94,2138.19 XS2.11@3437.4,2141.73 XS2.11@3440.94,2145.28 ; XS3.9@3440.94,2411.81 XS3.9@3439.37,2413.39 XS3.9@3440.94,2414.96 ; D6.1@4015.75,1803.15 4015.75,1830.71 4153.54,1830.71 4173.23,1811.02 4173.23,1728.35 4118.11,1673.23 D5.2@4110.24,1667.72 ; D9.1@5909.45,1803.15 5909.45,1830.71 6043.31,1830.71 6066.93,1807.09 6066.93,1730.71 D8.2@6003.94,1667.72 ; D19.14@6877.95,2158.27 6924.41,2158.27 v1(6925.2,2157.48) 6925.2,2086.61 v1(7149.61,1862.2) ; D18.14@7271.65,2158.27 7325.98,2158.27 v1(7322.83,2157.48) ; D21.2@7527.56,2903.15 7527.56,2901.57 7594.49,2901.57 7625.98,2870.08 D22.1@7625.98,2755.91 ; D12.1@7775.59,1881.89 D12.1@7775.59,1909.45 ; 7775.59,2177.17 D12.1@7775.59,1909.45 ; D11.2@7870.08,1746.46 7933.07,1809.45 7933.07,1885.83 7909.45,1909.45 D12.1@7775.59,1909.45
  Top Layer, Top w39.37: v1(3440.94,1783.46) XS2.12@3440.94,2038.19 ; XS2.12@3440.94,2045.28 XS2.11@3440.94,2138.19 ; XS2.11@3440.94,2145.28 XS3.9@3440.94,2411.81 ; XS3.9@3440.94,2414.96 XS3.10@3440.94,2511.81 ; XS1.18@5105.51,2041.73 5105.51,1977.17 v1(5299.21,1783.46)
  Bottom Layer, Bottom w19.68: v1(6925.2,2157.48) v1(7322.83,2157.48) ; D21.2@7527.56,2903.15 8100.79,2903.15 8149.61,2854.33 8149.61,1799.21 8098.43,1748.03 7870.08,1748.03 D11.2@7870.08,1746.46
  Bottom Layer, Bottom w39.37: D2.2@2216.54,1746.46 2216.54,1748.03 2291.34,1748.03 2326.77,1783.46 v1(3440.94,1783.46) 3917.32,1783.46 4031.5,1669.29 D5.2@4110.24,1669.29 ; D5.2@4110.24,1667.72 D5.2@4110.24,1669.29 ; D11.2@7870.08,1746.46 7792.91,1746.46 7677.17,1862.2 v1(7149.61,1862.2) 6429.13,1862.2 6236.22,1669.29 6003.94,1669.29 D8.2@6003.94,1667.72 6002.36,1669.29 5925.2,1669.29 5811.02,1783.46 v1(5299.21,1783.46) 4456.69,1783.46 4342.52,1669.29 D5.2@4110.24,1669.29
+3,3V_1: C13.2 C15.2 C16.2 C17.2 D1.2 D1.21 D1.44 D2.4 D3.16 R1.2 R19.2 R20.2 R24.1 R25.1 | length 3091
  Top Layer, Top w9.84: v1(1570.87,1468.5) 1606.3,1503.94 1677.17,1503.94 ; R19.2@1677.17,1545.28 1677.17,1503.94 ; R1.2@1826.77,1383.86 1824.8,1383.86 1775.59,1433.07 1744.09,1433.07 1728.35,1448.82 1728.35,1488.19 1712.6,1503.94 1677.17,1503.94
  Top Layer, Top w19.68: R19.2@1677.17,1545.28 v1(1677.17,1657.48) ; v1(2035.43,1716.54) 2074.8,1716.54 2122.05,1669.29 D3.16@2122.05,1509.25 ; D3.16@2122.05,1507.87 D3.16@2122.05,1509.25 ; v1(2165.35,1145.67) 2222.44,1145.67 C17.2@2224.41,1143.7 2224.41,1090.55 2244.09,1070.87 2405.51,1070.87 2429.13,1094.49 2429.13,1500 2381.89,1547.24 2216.54,1547.24 D2.4@2216.54,1546.46 2181.89,1511.81 2124.61,1511.81 D3.16@2122.05,1509.25
  Bottom Layer, Bottom w9.84: v1(1570.87,1468.5) 1570.87,1492.13 1586.61,1507.87 D1.21@1641.73,1507.87 ; R24.1@1925.2,1728.35 1925.2,1783.46 ; C15.2@2224.41,1143.7 2224.41,1145.67 2297.24,1145.67 R20.2@2299.21,1143.7
  Bottom Layer, Bottom w19.68: v1(1677.17,1657.48) 1661.42,1673.23 R25.1@1661.42,1728.35 1661.42,1732.28 1712.6,1783.46 1925.2,1783.46 1968.5,1783.46 v1(2035.43,1716.54) ; D1.2@2003.94,1145.67 2003.94,1196.85 2031.5,1224.41 2133.86,1224.41 2133.86,1177.17 v1(2165.35,1145.67) 2222.44,1145.67 C15.2@2224.41,1143.7 ; D2.4@2216.54,1546.46 2217.32,1547.24 2297.24,1547.24 C13.2@2299.21,1545.28 2301.18,1547.24 2372.05,1547.24 C16.2@2374.02,1545.28
+3,3V_2: C30.2 C32.2 C33.2 C34.2 D4.2 D4.21 D4.44 D5.4 D6.16 R26.2 R44.2 R45.2 R49.1 R50.1 | length 3088.2
  Top Layer, Top w9.84: v1(3464.57,1389.76) 3496.06,1421.26 3570.87,1421.26 ; R44.2@3570.87,1462.6 3570.87,1421.26 ; R26.2@3720.47,1301.18 3718.5,1303.15 3716.54,1303.15 3665.35,1354.33 3637.8,1354.33 3622.05,1370.08 3622.05,1401.57 3602.36,1421.26 3570.87,1421.26
  Top Layer, Top w19.68: R44.2@3570.87,1462.6 v1(3570.87,1578.74) ; v1(3929.13,1637.8) 3976.38,1637.8 4015.75,1598.43 D6.16@4015.75,1430.51 4018.31,1433.07 4075.59,1433.07 D5.4@4110.24,1467.72 4110.24,1468.5 4279.53,1468.5 4330.71,1417.32 4330.71,1027.56 4307.09,1003.94 4133.86,1003.94 4118.11,1019.68 C34.2@4118.11,1064.96 4116.14,1066.93 v1(4059.06,1066.93)
  Bottom Layer, Bottom w9.84: v1(3464.57,1389.76) 3464.57,1413.39 3480.32,1429.13 D4.21@3535.43,1429.13 ; R49.1@3822.83,1649.61 3822.83,1704.72 ; C32.2@4118.11,1064.96 4120.08,1066.93 4190.94,1066.93 R45.2@4192.91,1064.96
  Bottom Layer, Bottom w19.68: v1(3570.87,1578.74) 3559.06,1590.55 R50.1@3559.06,1649.61 3559.06,1653.54 3610.24,1704.72 3822.83,1704.72 3866.14,1704.72 3929.13,1641.73 v1(3929.13,1637.8) ; D4.2@3897.64,1066.93 3897.64,1122.05 3921.26,1145.67 4031.5,1145.67 4031.5,1094.49 v1(4059.06,1066.93) 4116.14,1066.93 C32.2@4118.11,1064.96 ; D5.4@4110.24,1467.72 4111.02,1468.5 4190.94,1468.5 C30.2@4192.91,1466.54 4194.88,1468.5 4269.69,1468.5 C33.2@4271.65,1466.54
+3,3V_3: C47.2 C49.2 C50.2 C51.2 D7.2 D7.21 D7.44 D8.4 D9.16 R51.2 R69.2 R70.2 R74.1 R75.1 | length 3073.6
  Top Layer, Top w9.84: v1(5358.27,1389.76) 5389.76,1421.26 5464.57,1421.26 ; R69.2@5464.57,1466.54 5464.57,1421.26 ; R51.2@5614.17,1305.12 5608.27,1311.02 5606.3,1311.02 5562.99,1354.33 5531.5,1354.33 5515.75,1370.08 5515.75,1397.64 5492.13,1421.26 5464.57,1421.26
  Top Layer, Top w19.68: R69.2@5464.57,1466.54 v1(5464.57,1578.74) ; v1(5822.83,1637.8) 5877.95,1637.8 5909.45,1606.3 D9.16@5909.45,1430.51 5912.01,1433.07 5969.29,1433.07 D8.4@6003.94,1467.72 6003.94,1468.5 6169.29,1468.5 6220.47,1417.32 6220.47,1027.56 6200.79,1007.87 6027.56,1007.87 6011.81,1023.62 C51.2@6011.81,1064.96 6009.84,1066.93 v1(5952.76,1066.93)
  Bottom Layer, Bottom w9.84: v1(5358.27,1389.76) 5358.27,1413.39 5374.02,1429.13 D7.21@5429.13,1429.13 ; R74.1@5712.6,1649.61 5712.6,1704.72 ; C49.2@6011.81,1064.96 6011.81,1066.93 6084.65,1066.93 R70.2@6086.61,1064.96
  Bottom Layer, Bottom w19.68: v1(5464.57,1578.74) 5448.82,1594.49 R75.1@5448.82,1649.61 5448.82,1653.54 5500,1704.72 5712.6,1704.72 5755.91,1704.72 v1(5822.83,1637.8) ; D7.2@5791.34,1066.93 5791.34,1122.05 5814.96,1145.67 D7.44@5901.57,1145.67 5921.26,1145.67 5921.26,1098.43 v1(5952.76,1066.93) 6009.84,1066.93 C49.2@6011.81,1064.96 ; D8.4@6003.94,1467.72 6004.72,1468.5 6084.65,1468.5 C47.2@6086.61,1466.54 6088.58,1468.5 6159.45,1468.5 C50.2@6161.42,1466.54
+3,3V_4: C64.2 C66.2 C67.2 C68.2 D10.2 D10.21 D10.44 D11.4 D12.16 R76.2 R94.2 R95.2 R99.1 R100.1 | length 3084.3
  Top Layer, Top w9.84: v1(7224.41,1468.5) 7255.91,1500 7330.71,1500 ; R94.2@7330.71,1545.28 7330.71,1500 ; R76.2@7480.31,1383.86 7478.35,1385.83 7476.38,1385.83 7429.13,1433.07 7393.7,1433.07 7377.95,1448.82 7377.95,1480.32 7358.27,1500 7330.71,1500
  Top Layer, Top w19.68: R94.2@7330.71,1545.28 v1(7330.71,1657.48) ; v1(7688.98,1720.47) 7748.03,1720.47 7775.59,1692.91 D12.16@7775.59,1509.25 ; D12.16@7775.59,1507.87 D12.16@7775.59,1509.25 ; v1(7818.9,1145.67) C68.2@7874.02,1145.67 ; C68.2@7877.95,1143.7 7875.98,1145.67 C68.2@7874.02,1145.67 ; D12.16@7775.59,1509.25 7778.15,1511.81 7835.43,1511.81 D11.4@7870.08,1546.46 7870.08,1547.24 8035.43,1547.24 8086.61,1496.06 8086.61,1102.36 8070.87,1086.61 7889.76,1086.61 7877.95,1098.43 7877.95,1141.73 7876.97,1142.72 C68.2@7874.02,1145.67
  Bottom Layer, Bottom w9.84: v1(7224.41,1468.5) 7224.41,1488.19 7244.09,1507.87 D10.21@7295.28,1507.87 ; R99.1@7578.74,1728.35 7578.74,1783.46 ; C66.2@7877.95,1143.7 7879.92,1145.67 7950.79,1145.67 R95.2@7952.76,1143.7
  Bottom Layer, Bottom w19.68: v1(7330.71,1657.48) 7314.96,1673.23 R100.1@7314.96,1728.35 7314.96,1732.28 7366.14,1783.46 7578.74,1783.46 7625.98,1783.46 v1(7688.98,1720.47) ; D10.2@7657.48,1145.67 7657.48,1196.85 7685.04,1224.41 7787.4,1224.41 7787.4,1177.17 v1(7818.9,1145.67) 7875.98,1145.67 C66.2@7877.95,1143.7 ; D11.4@7870.08,1546.46 7870.87,1547.24 7950.79,1547.24 C64.2@7952.76,1545.28 7954.72,1547.24 8025.59,1547.24 C67.2@8027.56,1545.28
+3,3VR: C90.2 C91.2 D21.4 D22.16 D23.8 R190.1 R191.1 R192.1 R193.1 | length 1459.1
  Top Layer, Top w19.68: v1(6862.2,3035.43) R192.1@7169.29,3035.43 R193.1@7244.09,3035.43 7377.95,3035.43 7445.67,3103.15 D21.4@7527.56,3103.15 7566.14,3141.73 7625.98,3141.73 D22.16@7625.98,3128.54
  Bottom Layer, Bottom w19.68: R190.1@6728.35,3035.43 R191.1@6803.15,3035.43 v1(6862.2,3035.43) ; D21.4@7527.56,3103.15 7527.56,3102.36 7561.02,3068.9 C90.2@7614.17,3068.9 7616.14,3066.93 7687.01,3066.93 C91.2@7688.98,3068.9 7690.94,3066.93 7783.46,3066.93 7877.95,3161.42 D23.8@7975.59,3161.42
+5V: C88.2 C89.2 L1.2 R196.1 XS2.19 XS2.20 XS3.1 XS3.2
  other v1: 2192.91,2248.03 2271.65,2248.03 2192.91,2330.71 2271.65,2330.71 2192.91,2409.45 2271.65,2409.45
+24V: C85.1 C86.2 D20.4 D20.5 VD1.2 | length 740.5
  Top Layer, Top w19.68: D20.5@1566.93,2566.93 1566.93,2688.98 1641.73,2763.78 VD1.2@1732.28,2763.78 C85.1@2011.81,2763.78
  Bottom Layer, Bottom w19.68: C86.2@1870.08,2761.81 1872.05,2763.78 C85.1@2011.81,2763.78
DIN1: D13.4 D14.4 | length 687
  Top Layer, Top w9.84: v1(7185.04,2704.72) 7244.09,2645.67 7582.68,2645.67 7675.2,2553.15 D13.4@7675.2,2503.94
  Bottom Layer, Bottom w9.84: v1(7185.04,2704.72) D14.4@7185.04,2789.61
DIN2: D13.5 D15.4 | length 1005.5
  Top Layer, Top w9.84: v1(7141.73,2704.72) 7220.47,2625.98 7574.8,2625.98 7649.61,2551.18 D13.5@7649.61,2503.94
  Bottom Layer, Bottom w9.84: D15.4@6937.01,2789.61 6937.01,2842.52 6948.82,2854.33 7098.43,2854.33 7110.24,2842.52 7110.24,2736.22 v1(7141.73,2704.72)
DIN3: D13.6 D16.4 | length 780.8
  Top Layer, Top w9.84: D16.4@7035.43,2789.61 7035.43,2708.66 7137.8,2606.3 7566.93,2606.3 7624.02,2549.21 D13.6@7624.02,2503.94
DIN4: D13.7 D17.4 | length 999.2
  Top Layer, Top w9.84: D17.4@6783.46,2789.61 6783.46,2716.54 6913.39,2586.61 7555.12,2586.61 7598.43,2543.31 D13.7@7598.43,2503.94
GND: C85.2 C86.1 C88.1 C89.1 D2.1 D3.2 D3.8 D5.1 D6.2 D6.8 D8.1 D9.2 D9.8 D11.1 D12.2 D12.8 D13.2 D13.3 D13.12 D13.21 D14.3 D15.3 D16.3 D17.3 D18.7 D19.1 D19.3 D19.7 D20.2 D21.1 D22.2 D22.4 D22.8 K1.2 K2.2 K3.2 K4.2 R195.1 VD1.1 VD2.A XS1.14 XS1.15 XS2.17 XS2.18 XS3.3 XS3.4 | length 11133.5
  Top Layer, Top w9.84: D19.3@6777.95,2377.95 6777.95,2431.5 6791.34,2444.88 6877.95,2444.88 ; D19.1@6877.95,2377.95 6877.95,2444.88 ; v1(6972.44,2444.88) 6877.95,2444.88 ; v1(7433.07,2503.94) D13.12@7470.47,2503.94 7470.47,2462.6 7480.31,2452.76 7598.43,2452.76 ; D13.21@7675.2,2248.03 7675.2,2293.31 7598.43,2370.08 7598.43,2452.76 ; D13.3@7700.79,2503.94 7700.79,2452.76 ; D13.2@7726.38,2503.94 7726.38,2458.66 7720.47,2452.76 7700.79,2452.76 ; 7598.43,2452.76 7700.79,2452.76
  Top Layer, Top w19.68: D20.2@1665.35,2566.93 v1(1728.35,2566.93) ; v1(1665.35,2862.2) VD1.1@1732.28,2862.2 v1(1799.21,2862.2) ; D3.8@1772.05,1881.89 1772.05,1818.5 1795.28,1795.28 2070.87,1795.28 ; D3.2@2072.05,1881.89 2072.05,1796.46 2070.87,1795.28 ; D2.1@2216.54,1846.46 2165.35,1795.28 2070.87,1795.28 ; D6.8@3665.75,1803.15 3665.75,1739.76 3688.98,1716.54 3964.57,1716.54 ; D6.2@3965.75,1803.15 3965.75,1717.72 3964.57,1716.54 ; D5.1@4110.24,1767.72 4059.06,1716.54 3964.57,1716.54 ; v1(4909.45,2633.86) 4909.45,2777.95 K1.2@4911.02,2779.53 ; v1(5307.09,2633.86) 5307.09,2777.95 K2.2@5308.66,2779.53 ; D9.8@5559.45,1803.15 5559.45,1735.83 5578.74,1716.54 5858.27,1716.54 ; v1(5708.66,2633.86) 5708.66,2777.95 K3.2@5710.24,2779.53 ; D9.2@5859.45,1803.15 5859.45,1717.72 5858.27,1716.54 ; D8.1@6003.94,1767.72 5952.76,1716.54 5858.27,1716.54 ; v1(6110.24,2633.86) 6110.24,2777.95 K4.2@6111.81,2779.53 ; v1(6578.74,2444.88) 6580.31,2443.31 D19.7@6580.31,2377.95 ; D17.3@6683.46,2789.61 6683.46,2848.82 6700.79,2866.14 6917.32,2866.14 6935.43,2848.03 D16.3@6935.43,2789.61 6933.07,2787.24 v1(6933.07,2704.72) ; v1(6972.44,2444.88) 6974.02,2443.31 D18.7@6974.02,2377.95 ; D12.8@7425.59,1881.89 7425.59,1814.57 7444.88,1795.28 7724.41,1795.28 ; D22.2@7675.98,2755.91 7675.98,2825.59 7696.85,2846.46 7775.59,2846.46 ; D12.2@7725.59,1881.89 7725.59,1796.46 7724.41,1795.28 ; D22.4@7775.98,2755.91 7775.98,2846.06 7775.59,2846.46 ; D11.1@7870.08,1846.46 7818.9,1795.28 7724.41,1795.28 ; v1(7976.38,2665.35) 7975.98,2665.75 D22.8@7975.98,2755.91 7975.98,2826.38 7976.38,2826.77 7956.69,2846.46 7775.59,2846.46
  Top Layer, Top w39.37: v1(1720.47,2153.54) C88.1@1783.46,2153.54 C89.1@1881.89,2153.54 v1(1944.88,2153.54) ; XS1.15@5205.91,2141.73 5303.15,2044.49 5303.15,2043.31 5304.33,2043.31 XS1.14@5305.91,2041.73 5303.54,2039.37 5303.15,2039.37 5354.33,1988.19 v1(5354.33,1846.46)
  Bottom Layer, Bottom w19.68: 7035.43,2704.72 7035.43,2788.03 D15.3@7037.01,2789.61 ; v1(7283.46,2704.72) 7283.46,2788.03 D14.3@7285.04,2789.61
  Bottom Layer, Bottom w39.37: 3137.8,1984.25 3137.8,2040.94 XS2.18@3137.01,2041.73 3137.8,2042.52 3137.8,2140.94 XS2.17@3137.01,2141.73 3137.8,2141.73 3137.8,2411.81 XS3.3@3139.37,2413.39 3137.8,2414.96 3137.8,2511.81 XS3.4@3139.37,2513.39 3137.8,2514.96 3137.8,2637.8 ; 3948.82,1846.46 4027.56,1767.72 D5.1@4110.24,1767.72 4346.46,1767.72 4429.13,1850.39 5838.58,1850.39 5921.26,1767.72 D8.1@6003.94,1767.72 6240.16,1767.72 6401.57,1929.13 7704.72,1929.13 7787.4,1846.46 D11.1@7870.08,1846.46 ; 5204.72,2208.66 5204.72,2142.91 XS1.15@5205.91,2141.73